# Altium PCB PCB1.PcbDoc (part 2 of 2)
Units mm, origin at the board's own origin, x right, y up, seen from the top; angles counter-clockwise.
Board outline 61.6 x 58.93 mm, 2 copper layers (Top Layer, Bottom Layer); 168 components, 16 nets, 520 pads, 0 vias.
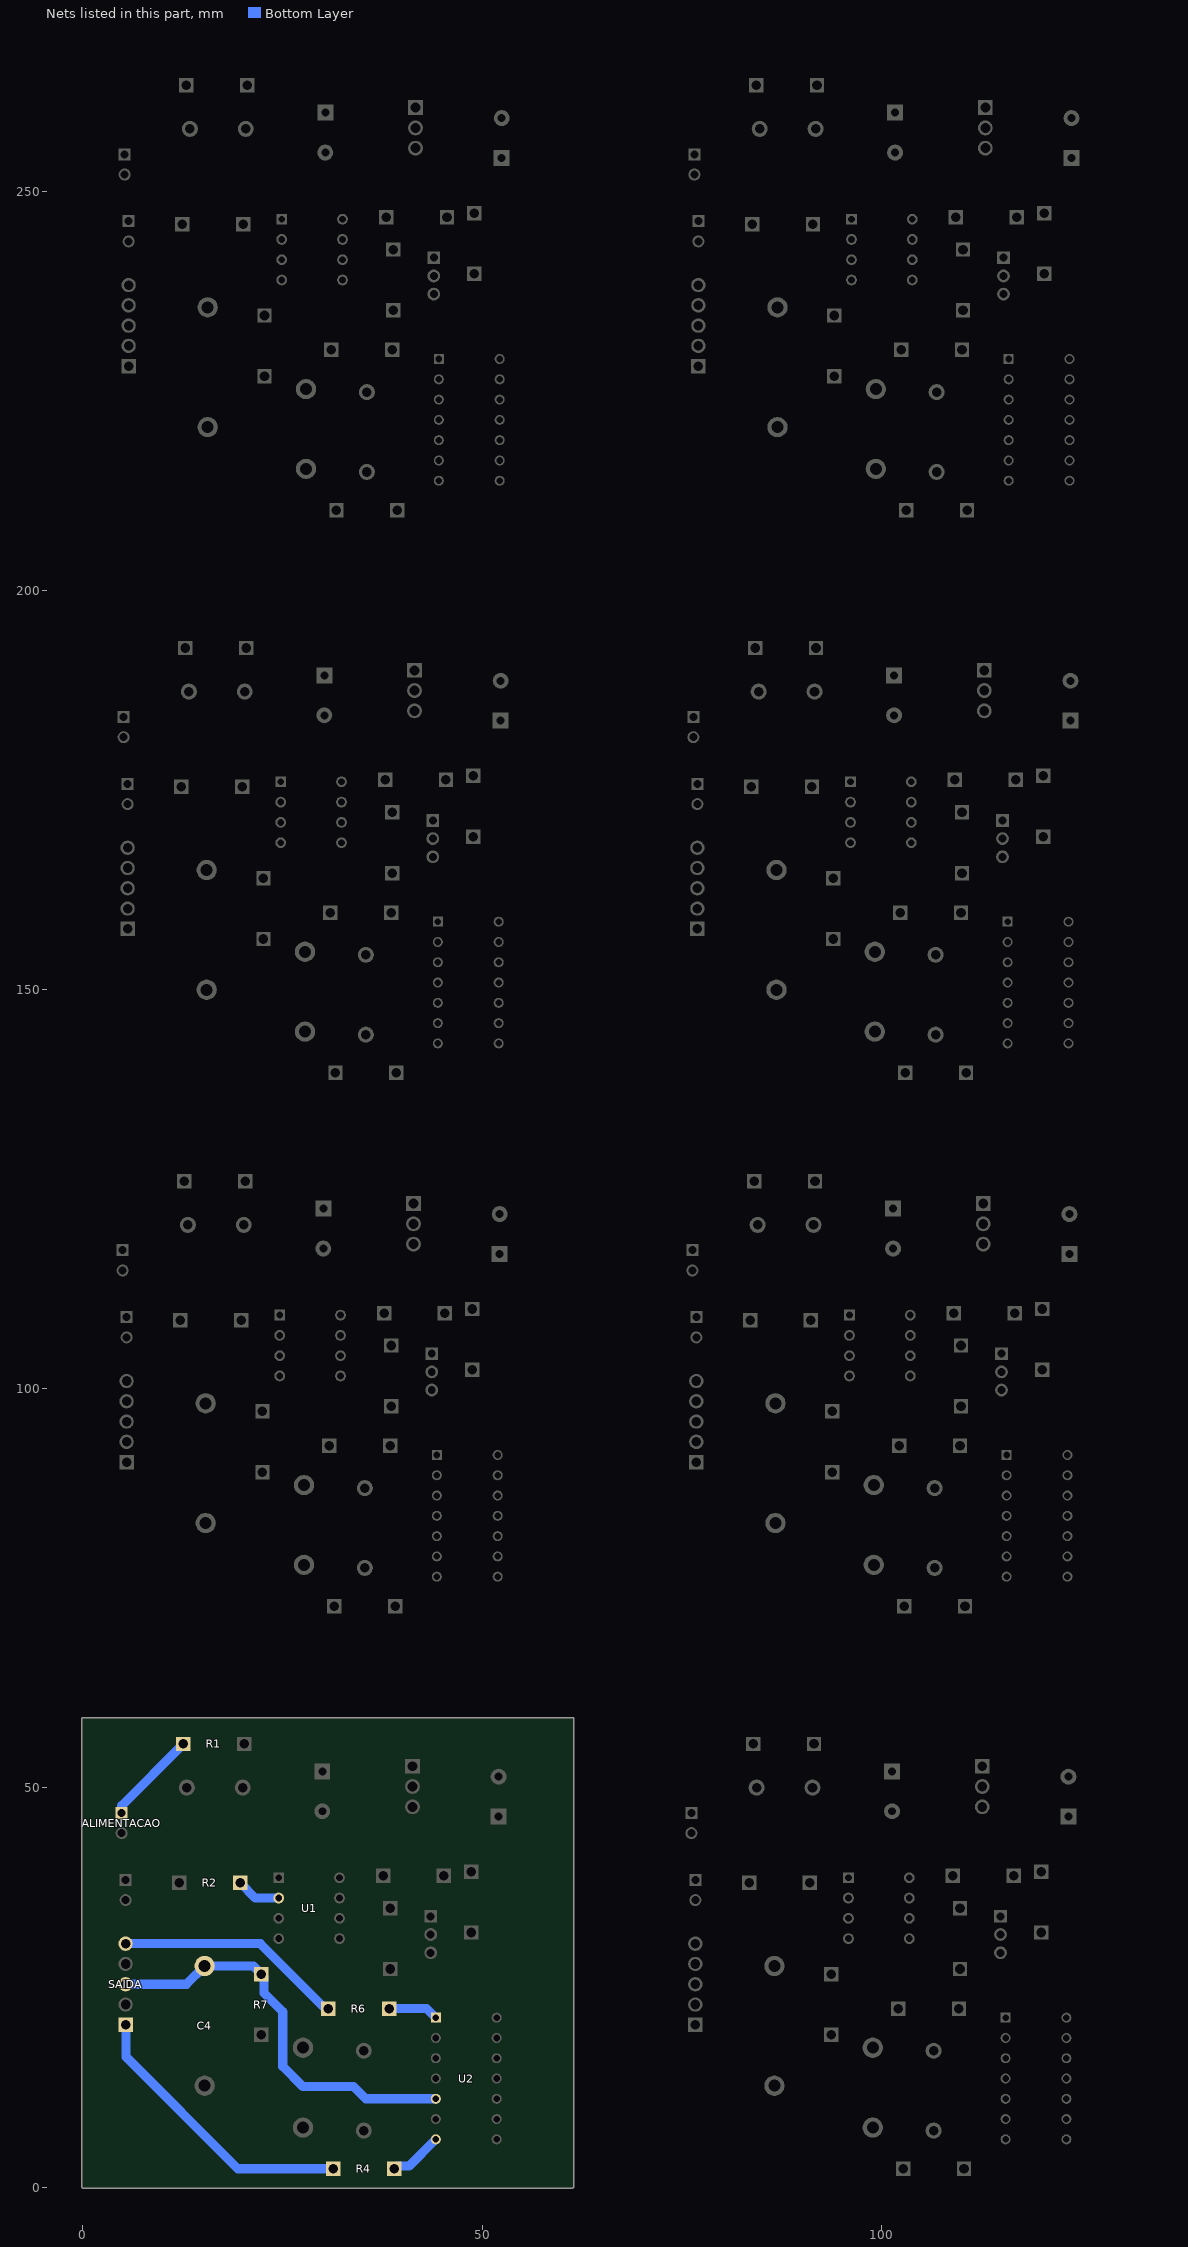
[diagram p2: the nets of this part, all layers, seen from the top]

## Nets (pads, with @x,y where several pads share a name; then routed paths per layer and width w, separated by ;. In a path a pad name is that pad's centre, name@x,y a point inside that pad or via, vN(x,y) a via of type N, cw(c..) or ccw(c..) an arc to the next point about the centre after c; other vN are vias at no path point) (continued)
NetR2_2: R2.2 U1.2 | length 5.6
  Bottom Layer w1.143: R2.2@19.685,38.1 21.59,36.195 U1.2@24.511,36.195
NetR4_2: R4.2 U2.7 | length 6.7
  Bottom Layer w1.143: R4.2@38.989,2.286 39.318,2.615 40.842,2.615 U2.7@44.196,5.969
NetR6_2: R6.2 U2.1 | length 6.3
  Bottom Layer w1.143: R6.2@38.354,22.352 43.053,22.352 U2.1@44.196,21.209
out_H: R4.1 SAIDA.1 | length 35.8
  Bottom Layer w1.143: SAIDA.1@5.334,20.32 5.409,20.245 5.409,16.286 19.409,2.286 R4.1@31.369,2.286
out_L: R6.1 SAIDA.5 | length 28.7
  Bottom Layer w1.143: SAIDA.5@5.334,30.48 22.225,30.48 R6.1@30.543,22.162
VCC: ALIMENTACAO.1 R1.1 | length 11.8
  Bottom Layer w1.143: ALIMENTACAO.1@4.84,46.863 4.84,47.766 R1.1@12.573,55.499
Vs: C4.2 R7.1 SAIDA.3 U2.5 | length 51.9
  Bottom Layer w1.143: SAIDA.3@5.334,25.4 12.954,25.4 C4.2@15.24,27.686 21.336,27.686 R7.1@22.352,26.67 22.681,26.341 22.681,24.295 25.019,21.957 25.019,15.113 27.559,12.573 33.909,12.573 35.433,11.049 U2.5@44.196,11.049
pads on no net: 15v_1.A 15v_1.K 15v_1_2.A 15v_1_2.K 15v_1_2_1.A 15v_1_2_1.K 15v_1_3.A 15v_1_3.K 15v_2.A 15v_2.K 15v_2_1.A 15v_2_1.K 15v_3.A 15v_3.K ALIMENTACAO_1.1 ALIMENTACAO_1.2 ALIMENTACAO_1_2.1 ALIMENTACAO_1_2.2 ALIMENTACAO_1_2_1.1 ALIMENTACAO_1_2_1.2 ALIMENTACAO_1_3.1 ALIMENTACAO_1_3.2 ALIMENTACAO_2.1 ALIMENTACAO_2.2 ALIMENTACAO_2_1.1 ALIMENTACAO_2_1.2 ALIMENTACAO_3.1 ALIMENTACAO_3.2 C1_1.1 C1_1.2 C1_1_2.1 C1_1_2.2 C1_1_2_1.1 C1_1_2_1.2 C1_1_3.1 C1_1_3.2 C1_2.1 C1_2.2 C1_2_1.1 C1_2_1.2 C1_3.1 C1_3.2 C2_1.1 C2_1.2 C2_1_2.1 C2_1_2.2 C2_1_2_1.1 C2_1_2_1.2 C2_1_3.1 C2_1_3.2 C2_2.1 C2_2.2 C2_2_1.1 C2_2_1.2 C2_3.1 C2_3.2 C3_1.1 C3_1.2 C3_1_2.1 C3_1_2.2 C3_1_2_1.1 C3_1_2_1.2 C3_1_3.1 C3_1_3.2 C3_2.1 C3_2.2 C3_2_1.1 C3_2_1.2 C3_3.1 C3_3.2 C4_1.1 C4_1.2 C4_1_2.1 C4_1_2.2 C4_1_2_1.1 C4_1_2_1.2 C4_1_3.1 C4_1_3.2 C4_2.1 C4_2.2 C4_2_1.1 C4_2_1.2 C4_3.1 C4_3.2 D2_1.A D2_1.K D2_1_2.A D2_1_2.K D2_1_2_1.A D2_1_2_1.K D2_1_3.A D2_1_3.K D2_2.A D2_2.K D2_2_1.A D2_2_1.K D2_3.A D2_3.K ENTRADA_1.1 ENTRADA_1.2 ENTRADA_1_2.1 ENTRADA_1_2.2 ENTRADA_1_2_1.1 ENTRADA_1_2_1.2 ENTRADA_1_3.1 ENTRADA_1_3.2 ENTRADA_2.1 ENTRADA_2.2 ENTRADA_2_1.1 ENTRADA_2_1.2 ENTRADA_3.1 ENTRADA_3.2 Q1_1.1 Q1_1.2 Q1_1.3 Q1_1_2.1 Q1_1_2.2 Q1_1_2.3 Q1_1_2_1.1 Q1_1_2_1.2 Q1_1_2_1.3 Q1_1_3.1 Q1_1_3.2 Q1_1_3.3 Q1_2.1 Q1_2.2 Q1_2.3 Q1_2_1.1 Q1_2_1.2 Q1_2_1.3 Q1_3.1 Q1_3.2 Q1_3.3 Q2_1.1 Q2_1.2 Q2_1.3 Q2_1_2.1 Q2_1_2.2 Q2_1_2.3 Q2_1_2_1.1 Q2_1_2_1.2 Q2_1_2_1.3 Q2_1_3.1 Q2_1_3.2 Q2_1_3.3 Q2_2.1 Q2_2.2 Q2_2.3 Q2_2_1.1 Q2_2_1.2 Q2_2_1.3 Q2_3.1 Q2_3.2 Q2_3.3 R1_1.1 R1_1.2 R1_1_2.1 R1_1_2.2 R1_1_2_1.1 R1_1_2_1.2 R1_1_3.1 R1_1_3.2 R1_2.1 R1_2.2 R1_2_1.1 R1_2_1.2 R1_3.1 R1_3.2 R2_1.1 R2_1.2 R2_1_2.1 R2_1_2.2 R2_1_2_1.1 R2_1_2_1.2 R2_1_3.1 R2_1_3.2 R2_2.1 R2_2.2 R2_2_1.1 R2_2_1.2 R2_3.1 R2_3.2 R3_1.1 R3_1.2 R3_1_2.1 R3_1_2.2 R3_1_2_1.1 R3_1_2_1.2 R3_1_3.1 R3_1_3.2 R3_2.1 R3_2.2 R3_2_1.1 R3_2_1.2 R3_3.1 R3_3.2 R4_1.1 R4_1.2 R4_1_2.1 R4_1_2.2 R4_1_2_1.1 R4_1_2_1.2 R4_1_3.1 R4_1_3.2 R4_2.1 R4_2.2 R4_2_1.1 R4_2_1.2 R4_3.1 R4_3.2 R5_1.1 R5_1.2 R5_1_2.1 R5_1_2.2 R5_1_2_1.1 R5_1_2_1.2 R5_1_3.1 R5_1_3.2 R5_2.1 R5_2.2 R5_2_1.1 R5_2_1.2 R5_3.1 R5_3.2 R6_1.1 R6_1.2 R6_1_2.1 R6_1_2.2 R6_1_2_1.1 R6_1_2_1.2 R6_1_3.1 R6_1_3.2 R6_2.1 R6_2.2 R6_2_1.1 R6_2_1.2 R6_3.1 R6_3.2 R7_1.1 R7_1.2 R7_1_2.1 R7_1_2.2 R7_1_2_1.1 R7_1_2_1.2 R7_1_3.1 R7_1_3.2 R7_2.1 R7_2.2 R7_2_1.1 R7_2_1.2 R7_3.1 R7_3.2 R8_1.1 R8_1.2 R8_1_2.1 R8_1_2.2 R8_1_2_1.1 R8_1_2_1.2 R8_1_3.1 R8_1_3.2 R8_2.1 R8_2.2 R8_2_1.1 R8_2_1.2 R8_3.1 R8_3.2 SAIDA_1.1 SAIDA_1.2 SAIDA_1.3 SAIDA_1.4 SAIDA_1.5 SAIDA_1_2.1 SAIDA_1_2.2 SAIDA_1_2.3 SAIDA_1_2.4 SAIDA_1_2.5 SAIDA_1_2_1.1 SAIDA_1_2_1.2 SAIDA_1_2_1.3 SAIDA_1_2_1.4 SAIDA_1_2_1.5 SAIDA_1_3.1 SAIDA_1_3.2 SAIDA_1_3.3 SAIDA_1_3.4 SAIDA_1_3.5 SAIDA_2.1 SAIDA_2.2 SAIDA_2.3 SAIDA_2.4 SAIDA_2.5 SAIDA_2_1.1 SAIDA_2_1.2 SAIDA_2_1.3 SAIDA_2_1.4 SAIDA_2_1.5 SAIDA_3.1 SAIDA_3.2 SAIDA_3.3 SAIDA_3.4 SAIDA_3.5 U1.1 U1.4 U1.7 U1_1.1 U1_1.2 U1_1.3 U1_1.4 U1_1.5 U1_1.6 U1_1.7 U1_1.8 U1_1_2.1 U1_1_2.2 U1_1_2.3 U1_1_2.4 U1_1_2.5 U1_1_2.6 U1_1_2.7 U1_1_2.8 U1_1_2_1.1 U1_1_2_1.2 U1_1_2_1.3 U1_1_2_1.4 U1_1_2_1.5 U1_1_2_1.6 U1_1_2_1.7 U1_1_2_1.8 U1_1_3.1 U1_1_3.2 U1_1_3.3 U1_1_3.4 U1_1_3.5 U1_1_3.6 U1_1_3.7 U1_1_3.8 U1_2.1 U1_2.2 U1_2.3 U1_2.4 U1_2.5 U1_2.6 U1_2.7 U1_2.8 U1_2_1.1 U1_2_1.2 U1_2_1.3 U1_2_1.4 U1_2_1.5 U1_2_1.6 U1_2_1.7 U1_2_1.8 U1_3.1 U1_3.2 U1_3.3 U1_3.4 U1_3.5 U1_3.6 U1_3.7 U1_3.8 U2.4 U2.8 U2.12 U2.14 U2_1.1 U2_1.2 U2_1.3 U2_1.4 U2_1.5 U2_1.6 U2_1.7 U2_1.8 U2_1.9 U2_1.10 U2_1.11 U2_1.12 U2_1.13 U2_1.14 U2_1_2.1 U2_1_2.2 U2_1_2.3 U2_1_2.4 U2_1_2.5 U2_1_2.6 U2_1_2.7 U2_1_2.8 U2_1_2.9 U2_1_2.10 U2_1_2.11 U2_1_2.12 U2_1_2.13 U2_1_2.14 U2_1_2_1.1 U2_1_2_1.2 U2_1_2_1.3 U2_1_2_1.4 U2_1_2_1.5 U2_1_2_1.6 U2_1_2_1.7 U2_1_2_1.8 U2_1_2_1.9 U2_1_2_1.10 U2_1_2_1.11 U2_1_2_1.12 U2_1_2_1.13 U2_1_2_1.14 U2_1_3.1 U2_1_3.2 U2_1_3.3 U2_1_3.4 U2_1_3.5 U2_1_3.6 U2_1_3.7 U2_1_3.8 U2_1_3.9 U2_1_3.10 U2_1_3.11 U2_1_3.12 U2_1_3.13 U2_1_3.14 U2_2.1 U2_2.2 U2_2.3 U2_2.4 U2_2.5 U2_2.6 U2_2.7 U2_2.8 U2_2.9 U2_2.10 U2_2.11 U2_2.12 U2_2.13 U2_2.14 U2_2_1.1 U2_2_1.2 U2_2_1.3 U2_2_1.4 U2_2_1.5 U2_2_1.6 U2_2_1.7 U2_2_1.8 U2_2_1.9 U2_2_1.10 U2_2_1.11 U2_2_1.12 U2_2_1.13 U2_2_1.14 U2_3.1 U2_3.2 U2_3.3 U2_3.4 U2_3.5 U2_3.6 U2_3.7 U2_3.8 U2_3.9 U2_3.10 U2_3.11 U2_3.12 U2_3.13 U2_3.14
copper on no net: | length 3618.1
  Bottom Layer w1.143: 1.905,99.568 3.048,98.425 ; 2.032,166.37 3.175,165.227 ; 2.159,236.855 3.302,235.712 ; 4.967,117.348 4.967,118.251 12.7,125.984 ; 5.094,184.15 5.094,185.053 12.827,192.786 ; 5.221,254.635 5.221,255.538 12.954,263.271 ; 5.461,90.805 5.536,90.73 5.536,86.771 19.536,72.771 31.496,72.771 ; 5.461,95.885 13.081,95.885 15.367,98.171 21.463,98.171 22.479,97.155 22.808,96.826 22.808,94.78 25.146,92.442 25.146,85.598 27.686,83.058 34.036,83.058 35.56,81.534 44.323,81.534 ; 5.461,98.425 3.048,98.425 ; 5.461,100.965 22.352,100.965 30.67,92.647 ; 5.461,106.426 8.805,106.426 11.091,104.14 24.638,104.14 ; 5.461,108.966 5.64,108.787 11.99,108.787 12.192,108.585 12.128,108.521 ; 5.588,157.607 5.663,157.532 5.663,153.573 19.663,139.573 31.623,139.573 ; 5.588,162.687 13.208,162.687 15.494,164.973 21.59,164.973 22.606,163.957 22.935,163.628 22.935,161.582 25.273,159.244 25.273,152.4 27.813,149.86 34.163,149.86 35.687,148.336 44.45,148.336 ; 5.588,165.227 3.175,165.227 ; 5.588,167.767 22.479,167.767 30.797,159.448 ; 5.588,173.228 8.932,173.228 11.218,170.942 24.765,170.942 ; 5.588,175.768 5.767,175.589 12.117,175.589 12.319,175.387 12.255,175.323 ; 5.715,228.092 5.79,228.017 5.79,224.058 19.79,210.058 31.75,210.058 ; 5.715,233.172 13.335,233.172 15.621,235.458 21.717,235.458 22.733,234.442 23.062,234.113 23.062,232.067 25.4,229.729 25.4,222.885 27.94,220.345 34.29,220.345 35.814,218.821 44.577,218.821 ; 5.715,235.712 3.302,235.712 ; 5.715,238.252 22.606,238.252 30.924,229.933 ; 5.715,243.713 9.059,243.713 11.345,241.427 24.892,241.427 ; 5.715,246.253 5.894,246.074 12.244,246.074 12.446,245.872 12.383,245.808 ; 10.287,91.313 8.636,92.964 8.255,92.964 8,93.219 5.587,93.219 5.461,93.345 2.956,93.345 2.286,94.015 2.286,97.663 3.048,98.425 ; 10.414,158.115 8.763,159.766 8.382,159.766 8.127,160.021 5.714,160.021 5.588,160.147 3.083,160.147 2.413,160.817 2.413,164.465 3.175,165.227 ; 10.541,228.6 8.89,230.251 8.509,230.251 8.254,230.506 5.841,230.506 5.715,230.632 3.21,230.632 2.54,231.302 2.54,234.95 3.302,235.712 ; 15.367,83.171 23.1,75.438 34.001,75.438 34.671,76.108 34.671,76.683 35.306,77.318 35.306,77.55 35.538,77.55 36.982,78.994 44.323,78.994 ; 15.494,149.973 23.227,142.24 34.128,142.24 34.798,142.91 34.798,143.485 35.433,144.12 35.433,144.352 35.665,144.352 37.109,145.796 44.45,145.796 ; 15.621,220.458 23.354,212.725 34.255,212.725 34.925,213.395 34.925,213.97 35.56,214.605 35.56,214.837 35.792,214.837 37.236,216.281 44.577,216.281 ; 19.812,108.585 21.717,106.68 24.638,106.68 ; 19.939,175.387 21.844,173.482 24.765,173.482 ; 20.066,245.872 21.971,243.967 24.892,243.967 ; 20.137,120.523 20.229,120.615 20.229,125.893 20.32,125.984 23.749,122.555 30.099,122.555 30.416,122.872 41.084,122.872 41.402,123.19 ; 20.264,187.325 20.356,187.417 20.356,192.695 20.447,192.786 23.876,189.357 30.226,189.357 30.543,189.674 41.212,189.674 41.529,189.992 ; 20.391,257.81 20.483,257.902 20.483,263.18 20.574,263.271 24.003,259.842 30.353,259.842 30.67,260.159 41.338,260.159 41.656,260.477 ; 27.686,87.931 27.903,87.714 35.142,87.714 35.306,87.55 39.196,87.55 40.132,86.614 44.323,86.614 47.371,83.566 47.371,81.153 49.53,78.994 51.943,78.994 56.072,78.994 59.055,81.977 59.055,102.743 51.816,109.982 48.768,109.982 48.768,113.451 52.197,116.88 50.967,118.11 41.402,118.11 45.339,114.173 45.339,110.628 43.572,112.395 35.433,112.395 32.258,109.22 ; 27.813,154.733 28.03,154.516 35.269,154.516 35.433,154.352 39.323,154.352 40.259,153.416 44.45,153.416 47.498,150.368 47.498,147.955 49.657,145.796 52.07,145.796 56.199,145.796 59.182,148.779 59.182,169.545 51.943,176.784 48.895,176.784 48.895,180.253 52.324,183.682 51.094,184.912 41.529,184.912 45.466,180.975 45.466,177.43 43.699,179.197 35.56,179.197 32.385,176.022 ; 27.94,225.218 28.157,225.001 35.396,225.001 35.56,224.837 39.45,224.837 40.386,223.901 44.577,223.901 47.625,220.853 47.625,218.44 49.784,216.281 52.197,216.281 56.326,216.281 59.309,219.264 59.309,240.03 52.07,247.269 49.022,247.269 49.022,250.738 52.451,254.167 51.221,255.397 41.656,255.397 45.593,251.46 45.593,247.915 43.826,249.682 35.687,249.682 32.512,246.507 ; 30.099,117.555 34.892,117.555 37.987,120.65 41.402,120.65 46.166,120.65 47.396,121.88 52.197,121.88 ; 30.226,184.357 35.019,184.357 38.114,187.452 41.529,187.452 46.293,187.452 47.523,188.682 52.324,188.682 ; 30.353,254.842 35.146,254.842 38.241,257.937 41.656,257.937 46.42,257.937 47.65,259.167 52.451,259.167 ; 32.258,104.14 37.338,104.14 38.608,105.41 ; 32.385,170.942 37.465,170.942 38.735,172.212 ; 32.512,241.427 37.592,241.427 38.862,242.697 ; 35.814,90.932 36.394,90.932 37.813,89.513 43.964,89.513 44.323,89.154 51.943,89.154 51.923,89.174 50.708,89.174 50.038,89.844 50.038,93.478 43.688,99.828 ; 35.941,157.734 36.521,157.734 37.94,156.315 44.091,156.315 44.45,155.956 52.07,155.956 52.05,155.976 50.835,155.976 50.165,156.646 50.165,160.28 43.815,166.63 ; 36.068,228.219 36.648,228.219 38.067,226.8 44.218,226.8 44.577,226.441 52.197,226.441 52.177,226.461 50.962,226.461 50.292,227.131 50.292,230.765 43.942,237.115 ; 37.719,109.474 37.719,106.299 38.608,105.41 ; 37.846,176.276 37.846,173.101 38.735,172.212 ; 37.973,246.761 37.973,243.586 38.862,242.697 ; 38.481,92.837 43.18,92.837 44.323,91.694 ; 38.608,97.79 38.608,100.457 40.259,102.108 43.688,102.108 ; 38.608,159.639 43.307,159.639 44.45,158.496 ; 38.735,164.592 38.735,167.259 40.386,168.91 43.815,168.91 ; 38.735,230.124 43.434,230.124 44.577,228.981 ; 38.862,235.077 38.862,237.744 40.513,239.395 43.942,239.395 ; 39.116,72.771 39.445,73.1 40.969,73.1 44.323,76.454 ; 39.243,139.573 39.572,139.902 41.096,139.902 44.45,143.256 ; 39.37,210.058 39.699,210.387 41.223,210.387 44.577,213.741 ; 43.688,104.388 46.742,104.388 48.768,102.362 54.483,96.647 54.483,85.145 53.432,84.094 51.963,84.094 51.943,84.074 ; 43.815,171.19 46.869,171.19 48.895,169.164 54.61,163.449 54.61,151.947 53.559,150.896 52.09,150.896 52.07,150.876 ; 43.942,241.675 46.996,241.675 49.022,239.649 54.737,233.934 54.737,222.432 53.686,221.381 52.217,221.381 52.197,221.361 ; 51.943,81.534 55.426,81.534 56.769,82.877 56.769,98.747 48.898,106.618 39.816,106.618 38.608,105.41 ; 52.07,148.336 55.553,148.336 56.896,149.679 56.896,165.549 49.025,173.42 39.943,173.42 38.735,172.212 ; 52.197,218.821 55.68,218.821 57.023,220.164 57.023,236.034 49.152,243.905 40.07,243.905 38.862,242.697 ; 73.152,29.083 74.295,27.94 ; 73.279,99.568 74.422,98.425 ; 73.406,166.37 74.549,165.227 ; 73.533,236.855 74.676,235.712 ; 76.214,46.863 76.214,47.766 83.947,55.499 ; 76.341,117.348 76.341,118.251 84.074,125.984 ; 76.468,184.15 76.468,185.053 84.201,192.786 ; 76.595,254.635 76.595,255.538 84.328,263.271 ; 76.708,20.32 76.783,20.245 76.783,16.286 90.783,2.286 102.743,2.286 ; 76.708,25.4 84.328,25.4 86.614,27.686 92.71,27.686 93.726,26.67 94.055,26.341 94.055,24.295 96.393,21.957 96.393,15.113 98.933,12.573 105.283,12.573 106.807,11.049 115.57,11.049 ; 76.708,27.94 74.295,27.94 ; 76.708,30.48 93.599,30.48 101.917,22.162 ; 76.708,35.941 80.052,35.941 82.338,33.655 95.885,33.655 ; 76.708,38.481 76.887,38.302 83.237,38.302 83.439,38.1 83.376,38.036 ; 76.835,90.805 76.91,90.73 76.91,86.771 90.91,72.771 102.87,72.771 ; 76.835,95.885 84.455,95.885 86.741,98.171 92.837,98.171 93.853,97.155 94.182,96.826 94.182,94.78 96.52,92.442 96.52,85.598 99.06,83.058 105.41,83.058 106.934,81.534 115.697,81.534 ; 76.835,98.425 74.422,98.425 ; 76.835,100.965 93.726,100.965 102.044,92.647 ; 76.835,106.426 80.179,106.426 82.465,104.14 96.012,104.14 ; 76.835,108.966 77.014,108.787 83.364,108.787 83.566,108.585 83.502,108.521 ; 76.962,157.607 77.037,157.532 77.037,153.573 91.037,139.573 102.997,139.573 ; 76.962,162.687 84.582,162.687 86.868,164.973 92.964,164.973 93.98,163.957 94.309,163.628 94.309,161.582 96.647,159.244 96.647,152.4 99.187,149.86 105.537,149.86 107.061,148.336 115.824,148.336 ; 76.962,165.227 74.549,165.227 ; 76.962,167.767 93.853,167.767 102.171,159.448 ; 76.962,173.228 80.306,173.228 82.592,170.942 96.139,170.942 ; 76.962,175.768 77.141,175.589 83.491,175.589 83.693,175.387 83.629,175.323 ; 77.089,228.092 77.164,228.017 77.164,224.058 91.164,210.058 103.124,210.058 ; 77.089,233.172 84.709,233.172 86.995,235.458 93.091,235.458 94.107,234.442 94.436,234.113 94.436,232.067 96.774,229.729 96.774,222.885 99.314,220.345 105.664,220.345 107.188,218.821 115.951,218.821 ; 77.089,235.712 74.676,235.712 ; 77.089,238.252 93.98,238.252 102.298,229.933 ; 77.089,243.713 80.433,243.713 82.719,241.427 96.266,241.427 ; 77.089,246.253 77.268,246.074 83.618,246.074 83.82,245.872 83.757,245.808 ; 81.534,20.828 79.883,22.479 79.502,22.479 79.247,22.734 76.834,22.734 76.708,22.86 74.203,22.86 73.533,23.53 73.533,27.178 74.295,27.94 ; 81.661,91.313 80.01,92.964 79.629,92.964 79.374,93.219 76.961,93.219 76.835,93.345 74.33,93.345 73.66,94.015 73.66,97.663 74.422,98.425 ; 81.788,158.115 80.137,159.766 79.756,159.766 79.501,160.021 77.088,160.021 76.962,160.147 74.457,160.147 73.787,160.817 73.787,164.465 74.549,165.227 ; 81.915,228.6 80.264,230.251 79.883,230.251 79.628,230.506 77.215,230.506 77.089,230.632 74.584,230.632 73.914,231.302 73.914,234.95 74.676,235.712 ; 86.614,12.686 94.347,4.953 105.248,4.953 105.918,5.623 105.918,6.198 106.553,6.833 106.553,7.065 106.785,7.065 108.229,8.509 115.57,8.509 ; 86.741,83.171 94.474,75.438 105.375,75.438 106.045,76.108 106.045,76.683 106.68,77.318 106.68,77.55 106.912,77.55 108.356,78.994 115.697,78.994 ; 86.868,149.973 94.601,142.24 105.502,142.24 106.172,142.91 106.172,143.485 106.807,144.12 106.807,144.352 107.039,144.352 108.483,145.796 115.824,145.796 ; 86.995,220.458 94.728,212.725 105.629,212.725 106.299,213.395 106.299,213.97 106.934,214.605 106.934,214.837 107.166,214.837 108.61,216.281 115.951,216.281 ; 91.059,38.1 92.964,36.195 95.885,36.195 ; 91.186,108.585 93.091,106.68 96.012,106.68 ; 91.313,175.387 93.218,173.482 96.139,173.482 ; 91.384,50.038 91.476,50.13 91.476,55.408 91.567,55.499 94.996,52.07 101.346,52.07 101.663,52.387 112.331,52.387 112.649,52.705 ; 91.44,245.872 93.345,243.967 96.266,243.967 ; 91.511,120.523 91.603,120.615 91.603,125.893 91.694,125.984 95.123,122.555 101.473,122.555 101.79,122.872 112.459,122.872 112.776,123.19 ; 91.638,187.325 91.73,187.417 91.73,192.695 91.821,192.786 95.25,189.357 101.6,189.357 101.917,189.674 112.585,189.674 112.903,189.992 ; 91.765,257.81 91.857,257.902 91.857,263.18 91.948,263.271 95.377,259.842 101.727,259.842 102.044,260.159 112.712,260.159 113.03,260.477 ; 98.933,17.446 99.15,17.229 106.389,17.229 106.553,17.065 110.443,17.065 111.379,16.129 115.57,16.129 118.618,13.081 118.618,10.668 120.777,8.509 123.19,8.509 127.319,8.509 130.302,11.492 130.302,32.258 123.063,39.497 120.015,39.497 120.015,42.966 123.444,46.395 122.214,47.625 112.649,47.625 116.586,43.688 116.586,40.143 114.819,41.91 106.68,41.91 103.505,38.735 ; 99.06,87.931 99.277,87.714 106.516,87.714 106.68,87.55 110.57,87.55 111.506,86.614 115.697,86.614 118.745,83.566 118.745,81.153 120.904,78.994 123.317,78.994 127.446,78.994 130.429,81.977 130.429,102.743 123.19,109.982 120.142,109.982 120.142,113.451 123.571,116.88 122.341,118.11 112.776,118.11 116.713,114.173 116.713,110.628 114.946,112.395 106.807,112.395 103.632,109.22 ; 99.187,154.733 99.404,154.516 106.643,154.516 106.807,154.352 110.697,154.352 111.633,153.416 115.824,153.416 118.872,150.368 118.872,147.955 121.031,145.796 123.444,145.796 127.573,145.796 130.556,148.779 130.556,169.545 123.317,176.784 120.269,176.784 120.269,180.253 123.698,183.682 122.468,184.912 112.903,184.912 116.84,180.975 116.84,177.43 115.073,179.197 106.934,179.197 103.759,176.022 ; 99.314,225.218 99.531,225.001 106.77,225.001 106.934,224.837 110.824,224.837 111.76,223.901 115.951,223.901 118.999,220.853 118.999,218.44 121.158,216.281 123.571,216.281 127.7,216.281 130.683,219.264 130.683,240.03 123.444,247.269 120.396,247.269 120.396,250.738 123.825,254.167 122.595,255.397 113.03,255.397 116.967,251.46 116.967,247.915 115.2,249.682 107.061,249.682 103.886,246.507 ; 101.346,47.07 106.139,47.07 109.234,50.165 112.649,50.165 117.413,50.165 118.643,51.395 123.444,51.395 ; 101.473,117.555 106.266,117.555 109.361,120.65 112.776,120.65 117.54,120.65 118.77,121.88 123.571,121.88 ; 101.6,184.357 106.393,184.357 109.488,187.452 112.903,187.452 117.667,187.452 118.897,188.682 123.698,188.682 ; 101.727,254.842 106.52,254.842 109.615,257.937 113.03,257.937 117.794,257.937 119.024,259.167 123.825,259.167 ; 103.505,33.655 108.585,33.655 109.855,34.925 ; 103.632,104.14 108.712,104.14 109.982,105.41 ; 103.759,170.942 108.839,170.942 110.109,172.212 ; 103.886,241.427 108.966,241.427 110.236,242.697 ; 107.061,20.447 107.641,20.447 109.06,19.028 115.211,19.028 115.57,18.669 123.19,18.669 123.17,18.689 121.955,18.689 121.285,19.359 121.285,22.993 114.935,29.343 ; 107.188,90.932 107.768,90.932 109.187,89.513 115.338,89.513 115.697,89.154 123.317,89.154 123.297,89.174 122.082,89.174 121.412,89.844 121.412,93.478 115.062,99.828 ; 107.315,157.734 107.895,157.734 109.314,156.315 115.465,156.315 115.824,155.956 123.444,155.956 123.424,155.976 122.209,155.976 121.539,156.646 121.539,160.28 115.189,166.63 ; 107.442,228.219 108.022,228.219 109.441,226.8 115.592,226.8 115.951,226.441 123.571,226.441 123.551,226.461 122.336,226.461 121.666,227.131 121.666,230.765 115.316,237.115 ; 108.966,38.989 108.966,35.814 109.855,34.925 ; 109.093,109.474 109.093,106.299 109.982,105.41 ; 109.22,176.276 109.22,173.101 110.109,172.212 ; 109.347,246.761 109.347,243.586 110.236,242.697 ; 109.728,22.352 114.427,22.352 115.57,21.209 ; 109.855,27.305 109.855,29.972 111.506,31.623 114.935,31.623 ; 109.855,92.837 114.554,92.837 115.697,91.694 ; 109.982,97.79 109.982,100.457 111.633,102.108 115.062,102.108 ; 109.982,159.639 114.681,159.639 115.824,158.496 ; 110.109,164.592 110.109,167.259 111.76,168.91 115.189,168.91 ; 110.109,230.124 114.808,230.124 115.951,228.981 ; 110.236,235.077 110.236,237.744 111.887,239.395 115.316,239.395 ; 110.363,2.286 110.692,2.615 112.216,2.615 115.57,5.969 ; 110.49,72.771 110.819,73.1 112.343,73.1 115.697,76.454 ; 110.617,139.573 110.946,139.902 112.47,139.902 115.824,143.256 ; 110.744,210.058 111.073,210.387 112.597,210.387 115.951,213.741 ; 114.935,33.903 117.989,33.903 120.015,31.877 125.73,26.162 125.73,14.66 124.679,13.609 123.21,13.609 123.19,13.589 ; 115.062,104.388 118.116,104.388 120.142,102.362 125.857,96.647 125.857,85.145 124.806,84.094 123.337,84.094 123.317,84.074 ; 115.189,171.19 118.243,171.19 120.269,169.164 125.984,163.449 125.984,151.947 124.933,150.896 123.464,150.896 123.444,150.876 ; 115.316,241.675 118.37,241.675 120.396,239.649 126.111,233.934 126.111,222.432 125.06,221.381 123.591,221.381 123.571,221.361 ; 123.19,11.049 126.673,11.049 128.016,12.392 128.016,28.262 120.145,36.133 111.063,36.133 109.855,34.925 ; 123.317,81.534 126.8,81.534 128.143,82.877 128.143,98.747 120.272,106.618 111.19,106.618 109.982,105.41 ; 123.444,148.336 126.927,148.336 128.27,149.679 128.27,165.549 120.399,173.42 111.317,173.42 110.109,172.212 ; 123.571,218.821 127.054,218.821 128.397,220.164 128.397,236.034 120.526,243.905 111.444,243.905 110.236,242.697

## Polygon pours and split planes (outlines as drawn)
no net on Bottom Layer "NONET_L02_P144" (solid, remove dead copper, pour order 144): 20.264,187.325 20.264,192.969 23.876,189.357 30.226,189.357
no net on Bottom Layer "NONET_L02_P142" (solid, remove dead copper, pour order 142): 41.529,184.912 43.307,178.943 45.466,176.276 53.975,174.879 52.324,184.912
no net on Bottom Layer (solid, pour order 140): 37.846,174.371
no net on Bottom Layer (solid, pour order 138): 36.703,170.942
no net on Bottom Layer "NONET_L02_P136" (solid, remove dead copper, pour order 136): 34.406,170.677 37.846,174.117 40.197,174.117 40.894,173.42 39.624,172.15 39.624,171.577
no net on Bottom Layer "NONET_L02_P134" (solid, remove dead copper, pour order 134): 0.254,195.961 0.254,137.287 61.595,137.287 61.595,195.961
no net on Bottom Layer "NONET_L02_P132" (solid, remove dead copper, pour order 132): 71.628,195.961 71.628,137.287 132.969,137.287 132.969,195.961
no net on Bottom Layer "NONET_L02_P130" (solid, remove dead copper, pour order 130): 105.78,170.677 109.22,174.117 111.571,174.117 112.268,173.42 110.998,172.15 110.998,171.577
no net on Bottom Layer (solid, pour order 128): 108.077,170.942
no net on Bottom Layer (solid, pour order 126): 109.22,174.371
no net on Bottom Layer "NONET_L02_P124" (solid, remove dead copper, pour order 124): 112.903,184.912 114.681,178.943 116.84,176.276 125.349,174.879 123.698,184.912
no net on Bottom Layer "NONET_L02_P122" (solid, remove dead copper, pour order 122): 91.638,187.325 91.638,192.969 95.25,189.357 101.6,189.357
no net on Bottom Layer "NONET_L02_P096" (solid, remove dead copper, pour order 96): 91.765,257.81 91.765,263.454 95.377,259.842 101.727,259.842
no net on Bottom Layer "NONET_L02_P094" (solid, remove dead copper, pour order 94): 113.03,255.397 114.808,249.428 116.967,246.761 125.476,245.364 123.825,255.397
no net on Bottom Layer (solid, pour order 92): 109.347,244.856
no net on Bottom Layer (solid, pour order 90): 108.204,241.427
no net on Bottom Layer "NONET_L02_P088" (solid, remove dead copper, pour order 88): 105.907,241.162 109.347,244.602 111.698,244.602 112.395,243.905 111.125,242.635 111.125,242.062
no net on Bottom Layer "NONET_L02_P086" (solid, remove dead copper, pour order 86): 71.755,266.446 71.755,207.772 133.096,207.772 133.096,266.446
no net on Bottom Layer "NONET_L02_P084" (solid, remove dead copper, pour order 84): 0.381,266.446 0.381,207.772 61.722,207.772 61.722,266.446
no net on Bottom Layer "NONET_L02_P082" (solid, remove dead copper, pour order 82): 34.533,241.162 37.973,244.602 40.324,244.602 41.021,243.905 39.751,242.635 39.751,242.062
no net on Bottom Layer (solid, pour order 80): 36.83,241.427
no net on Bottom Layer (solid, pour order 78): 37.973,244.856
no net on Bottom Layer "NONET_L02_P076" (solid, remove dead copper, pour order 76): 41.656,255.397 43.434,249.428 45.593,246.761 54.102,245.364 52.451,255.397
no net on Bottom Layer "NONET_L02_P074" (solid, remove dead copper, pour order 74): 20.391,257.81 20.391,263.454 24.003,259.842 30.353,259.842
no net on Bottom Layer "NONET_L02_P072" (solid, remove dead copper, pour order 72): 20.137,120.523 20.137,126.167 23.749,122.555 30.099,122.555
no net on Bottom Layer "NONET_L02_P070" (solid, remove dead copper, pour order 70): 41.402,118.11 43.18,112.141 45.339,109.474 53.848,108.077 52.197,118.11
no net on Bottom Layer (solid, pour order 68): 37.719,107.569
no net on Bottom Layer (solid, pour order 66): 36.576,104.14
no net on Bottom Layer "NONET_L02_P064" (solid, remove dead copper, pour order 64): 34.279,103.875 37.719,107.315 40.07,107.315 40.767,106.618 39.497,105.348 39.497,104.775
no net on Bottom Layer "NONET_L02_P062" (solid, remove dead copper, pour order 62): 0.127,129.159 0.127,70.485 61.468,70.485 61.468,129.159
no net on Bottom Layer "NONET_L02_P060" (solid, remove dead copper, pour order 60): 71.501,129.159 71.501,70.485 132.842,70.485 132.842,129.159
no net on Bottom Layer "NONET_L02_P058" (solid, remove dead copper, pour order 58): 105.653,103.875 109.093,107.315 111.444,107.315 112.141,106.618 110.871,105.348 110.871,104.775
no net on Bottom Layer (solid, pour order 56): 107.95,104.14
no net on Bottom Layer (solid, pour order 54): 109.093,107.569
no net on Bottom Layer "NONET_L02_P052" (solid, remove dead copper, pour order 52): 112.776,118.11 114.554,112.141 116.713,109.474 125.222,108.077 123.571,118.11
no net on Bottom Layer "NONET_L02_P050" (solid, remove dead copper, pour order 50): 91.511,120.523 91.511,126.167 95.123,122.555 101.473,122.555
no net on Bottom Layer "NONET_L02_P024" (solid, remove dead copper, pour order 24): 91.384,50.038 91.384,55.682 94.996,52.07 101.346,52.07
no net on Bottom Layer "NONET_L02_P022" (solid, remove dead copper, pour order 22): 112.649,47.625 114.427,41.656 116.586,38.989 125.095,37.592 123.444,47.625
no net on Bottom Layer (solid, pour order 20): 108.966,37.084
no net on Bottom Layer (solid, pour order 18): 107.823,33.655
no net on Bottom Layer "NONET_L02_P016" (solid, remove dead copper, pour order 16): 105.526,33.39 108.966,36.83 111.317,36.83 112.014,36.133 110.744,34.863 110.744,34.29
no net on Bottom Layer "NONET_L02_P014" (solid, remove dead copper, pour order 14): 71.374,58.674 71.374,0 132.715,0 132.715,58.674
GND on Bottom Layer "GND_L02_P012" (solid, remove dead copper, pour order 12): 0,58.674 0,0 61.341,0 61.341,58.674
H_IN on Bottom Layer "H_IN_L02_P010" (solid, remove dead copper, pour order 10): 34.152,33.39 37.592,36.83 39.943,36.83 40.64,36.133 39.37,34.863 39.37,34.29
no net on Bottom Layer (solid, pour order 8): 36.449,33.655
no net on Bottom Layer (solid, pour order 6): 37.592,37.084
+12 on Bottom Layer "+12_L02_P002" (solid, remove dead copper, pour order 2): 41.275,47.625 43.053,41.656 45.212,38.989 53.721,37.592 52.07,47.625
Net15v_K on Bottom Layer "NET15V_K_L02_P000" (solid, remove dead copper, pour order 0): 20.01,50.038 20.01,55.682 23.622,52.07 29.972,52.07

## Other copper
Bottom Layer:
  text "V 0.1" at 8.763,216.506 h1.52
  text "V 0.1" at 80.137,216.506 h1.52
  text "mosfet" at 12.573,213.233 h1.52
  text "mosfet" at 83.947,213.233 h1.52
  text "Driver" at 15.367,209.931 h1.52
  text "Driver" at 86.741,209.931 h1.52
  text "V 0.1" at 8.636,146.021 h1.52
  text "V 0.1" at 80.01,146.021 h1.52
  text "mosfet" at 12.446,142.748 h1.52
  text "mosfet" at 83.82,142.748 h1.52
  text "Driver" at 15.24,139.446 h1.52
  text "Driver" at 86.614,139.446 h1.52
  text "V 0.1" at 8.509,79.219 h1.52
  text "V 0.1" at 79.883,79.219 h1.52
  text "mosfet" at 12.319,75.946 h1.52
  text "mosfet" at 83.693,75.946 h1.52
  text "Driver" at 15.113,72.644 h1.52
  text "Driver" at 86.487,72.644 h1.52
  text "V 0.1" at 8.382,8.734 h1.52
  text "V 0.1" at 79.756,8.734 h1.52
  text "mosfet" at 12.192,5.461 h1.52
  text "mosfet" at 83.566,5.461 h1.52
  text "Driver" at 14.986,2.159 h1.52
  text "Driver" at 86.36,2.159 h1.52

## Silkscreen, mask and mechanical layers (free items; w line width, h text height)
Mechanical 1:
  drawing of 104 lines, arcs and shapes, not listed

## Dimensions
0,0 to 61.341,0 on Mechanical 1
0,0 to 0,58.674 on Mechanical 1